# Altium PCB Battery_Flex.PcbDoc
Units mm, origin at the board's own origin, x right, y up, seen from the top; angles counter-clockwise.
Board outline 55.75 x 81.77 mm, 2 copper layers (Top Layer, Bottom Layer), stack 0.095 mm thick; 2 components, 3 nets, 20 pads, 30 vias.
Unrouted connection lines stored in the file: 17.
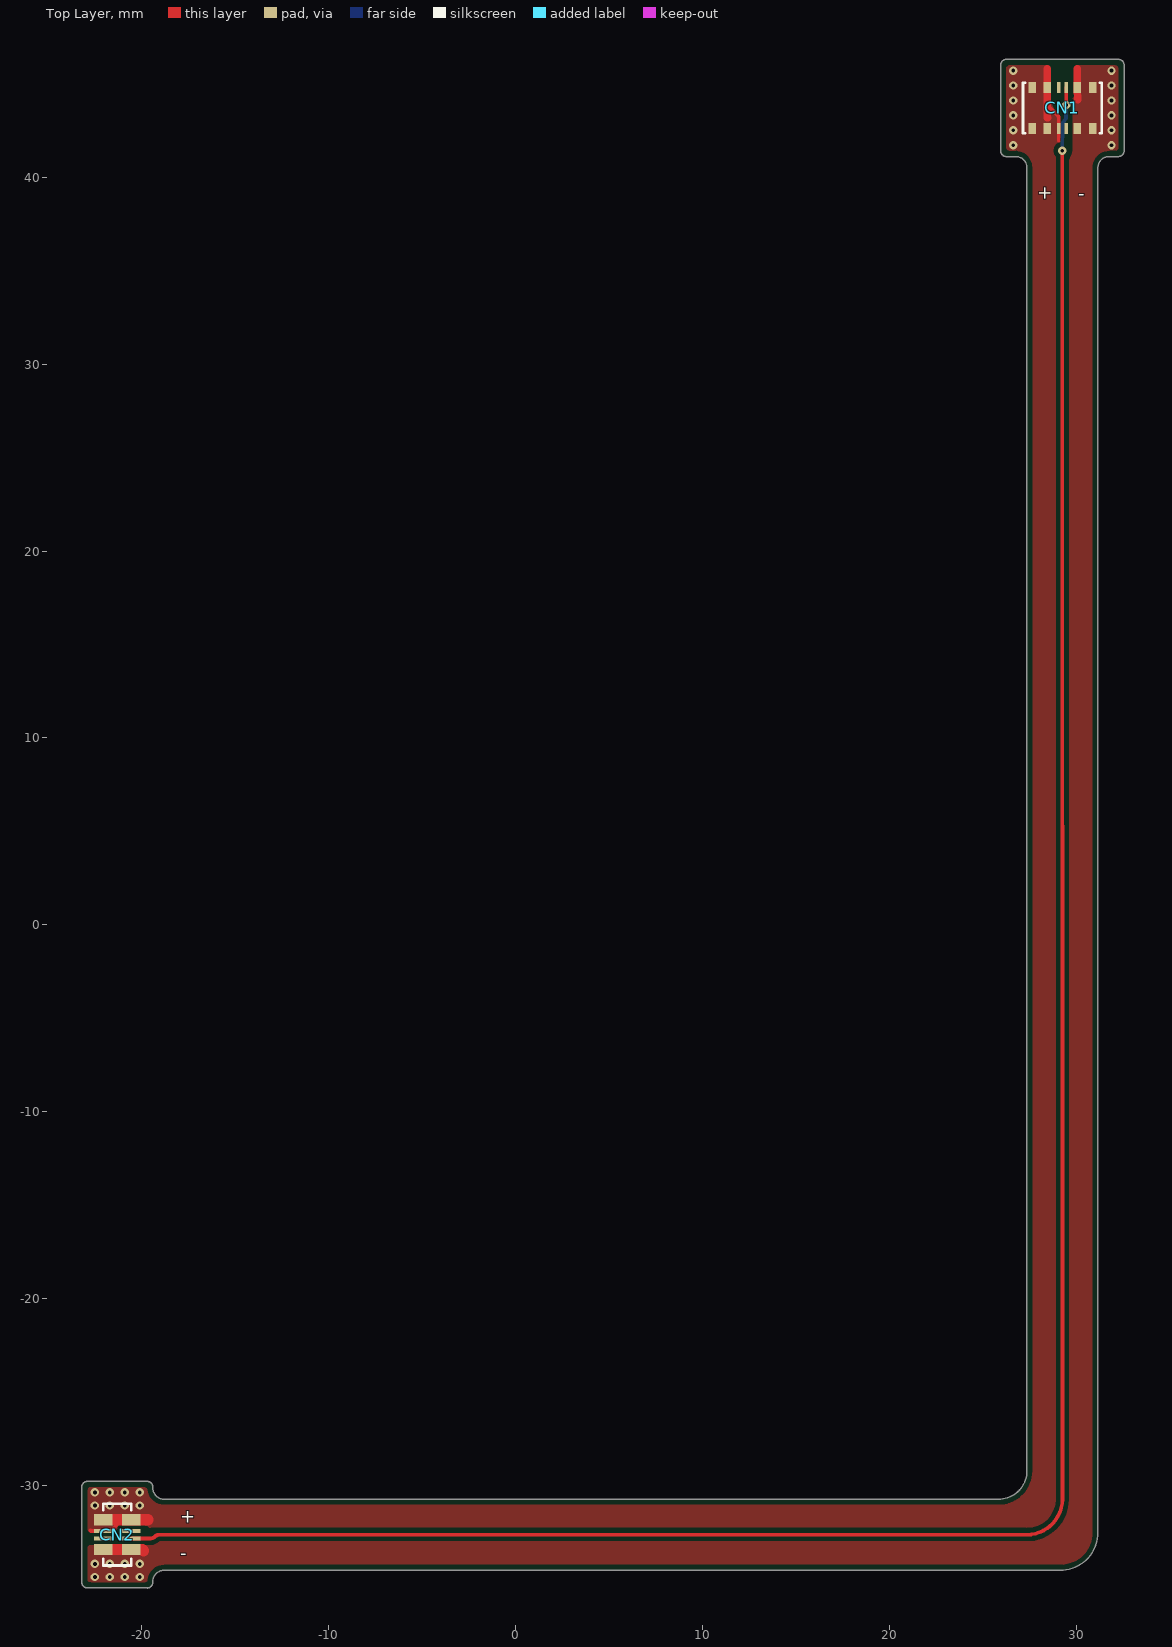
[diagram p0: Top Layer view]
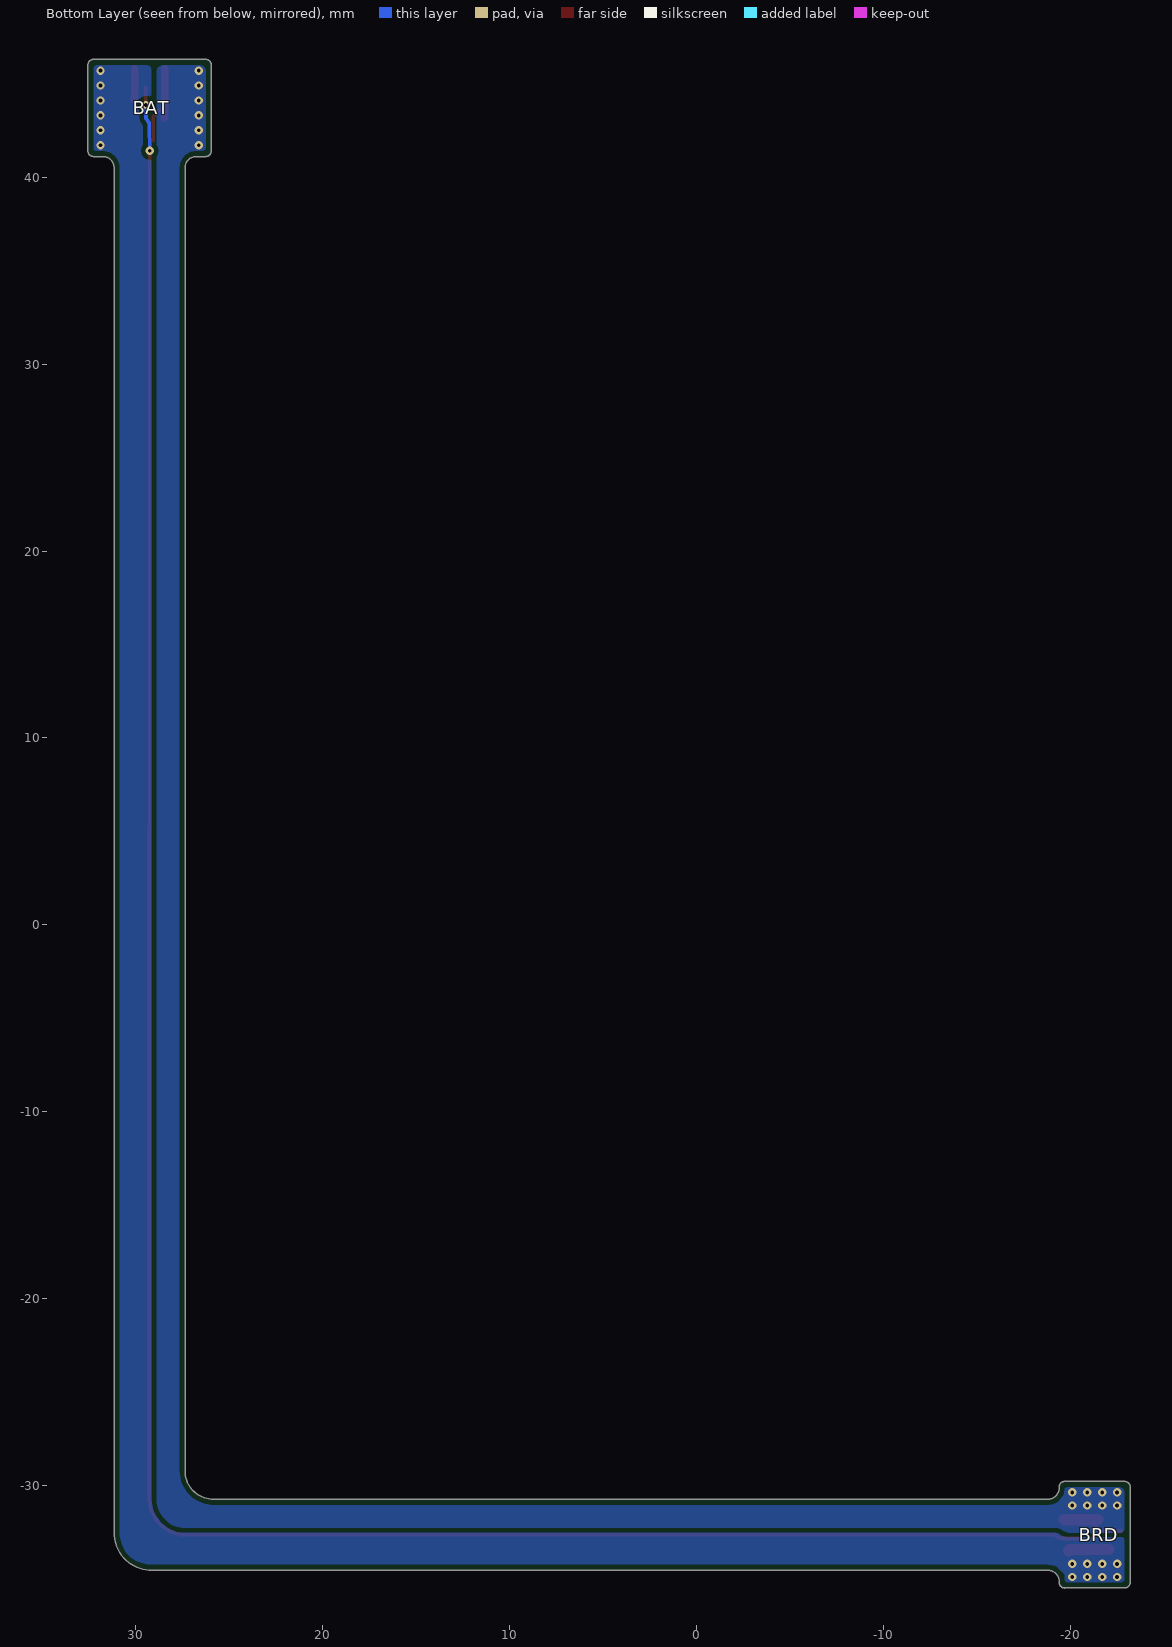
[diagram p1: Bottom Layer view, seen from below]

## Layer stack, top to bottom
Top Solder: solder mask 0.05, Solder Resist, Dk 2.9
Top Layer: signal copper 0.035
Dielectric1: prepreg 0.025, FR-4, Dk 3.3
Bottom Layer: signal copper 0.035
Bottom Solder: solder mask 0.05, Solder Resist, Dk 2.9

## Board outline
-22.897,-35.461 -19.706,-35.461 -19.709,-35.466 ccw(c-19.703,-35.166) -19.403,-35.164 -19.403,-35.121 cw(c-18.803,-35.116) -18.792,-34.516 -18.792,-34.511 29.111,-34.511 ccw(c29.15,-32.511) 31.15,-32.493 31.15,40.494 cw(c31.75,40.5) 31.762,41.099 32.244,41.099 ccw(c32.25,41.399) 32.55,41.402 32.55,45.993 ccw(c32.25,45.999) 32.247,46.299 26.256,46.299 ccw(c26.25,45.999) 25.95,45.996 25.95,41.405 ccw(c26.25,41.399) 26.253,41.099 26.745,41.099 cw(c26.751,40.499) 27.35,40.487 27.35,-29.196 27.349,-29.198 cw(c25.849,-29.211) 25.82,-30.711 -18.776,-30.711 -18.795,-30.711 cw(c-18.801,-30.111) -19.4,-30.1 -19.4,-30.067 ccw(c-19.7,-30.062) -19.703,-29.762 -22.894,-29.761 ccw(c-22.9,-30.061) -23.2,-30.064 -23.2,-35.155 ccw(c-22.9,-35.161)

## Design rules (kind name [scope] priority, off if disabled: settings)
BoardOutlineClearance Stiffener [OnLayer('Stiffener')] p1: gap=0 ignorepadtopadclearanceinfootprint=FALSE except(0.3: Track-OutlineEdge Track-CutoutEdge THPad-OutlineEdge THPad-CutoutEdge Via-OutlineEdge Via-CutoutEdge Fill-CutoutEdge Poly-CutoutEdge Region-CutoutEdge)
BoardOutlineClearance BoardOutlineClearanceAll [All] p2: gap=0 ignorepadtopadclearanceinfootprint=FALSE except(0.3: Track-OutlineEdge Track-CutoutEdge SMDPad-OutlineEdge THPad-OutlineEdge THPad-CutoutEdge Via-OutlineEdge Via-CutoutEdge Fill-OutlineEdge Fill-CutoutEdge Poly-OutlineEdge Poly-CutoutEdge Region-CutoutEdge)
Clearance [All] p1: gap=0.254 ignorepadtopadclearanceinfootprint=FALSE except(0: Via-Text Fill-Text Poly-Text Region-Text; 0.089: Arc-Arc Arc-Track Track-Track; 0.1: Arc-Via Track-Via; 0.127: SMDPad-SMDPad; 0.15: Arc-SMDPad Track-SMDPad Text-Text; 0.2: Arc-THPad Arc-Text Arc-Hole Track-THPad Track-Text Track-Hole SMDPad-THPad SMDPad-Via SMDPad-Text SMDPad-Hole THPad-THPad THPad-Via THPad-Text THPad-Hole Via-Via Via-Hole Fill-Hole Poly-Hole Region-Hole Text-Hole)
DiffPairsRouting [InDifferentialPairClass('All Differential Pairs')] p1: maxlimit=0.127 minlimit=0.127 mostfreqgap=0.127 toplayer_minwidth=0.052 toplayer_maxwidth=0.052 toplayer_prefwidth=0.052 bottomlayer_minwidth=0.052 bottomlayer_maxwidth=0.052 bottomlayer_prefwidth=0.052 maxuncoupledlength=12.7
HoleSize [All] p1: absolutevalues=TRUE maxlimit=6.5 minlimit=0.15 maxpercent=80.000 minpercent=20.000
HoleToHoleClearance [IsPad vs IsPad] p1: gap=0.45 allowstackedmicrovias=TRUE
MatchedLengths MatchedLengths_1 [All] p1: tolerance=0.127 checknetsindiffpair=TRUE checkdiffpairvsdiffpair=FALSE checkxsignals=FALSE checkothers=FALSE
MinimumAnnularRing [All] p1: minimumring=0.1
MinimumSolderMaskSliver [All] p1: minsoldermaskwidth=0
PlaneClearance [All] p1: clearance=0.3
PlaneConnect [All] p1: pad.planeconnectstyle=Relief pad.reliefexpansion=0.508 pad.reliefentries=4 pad.reliefconductorwidth=0.254 pad.reliefairgap=0.254 via.planeconnectstyle=Direct via.reliefexpansion=0.508 via.reliefentries=4 via.reliefconductorwidth=0.254 via.reliefairgap=0.254
PolygonConnect ALL [All] p1: connectstyle=Direct reliefconductorwidth=0.254 reliefentries=4 polygonreliefangle="90 Angle" airgapwidth=0.254
PolygonConnect 3V3 [InNet('+3V3')] p2: connectstyle=Direct reliefconductorwidth=0.254 reliefentries=4 polygonreliefangle="90 Angle" airgapwidth=0.254
PolygonConnect GND [InNet('GND')] p3: thpad.connectstyle=Relief thpad.reliefconductorwidth=0.254 thpad.reliefentries=4 thpad.polygonreliefangle="90 Angle" thpad.airgapwidth=0.254 smdpad.connectstyle=Relief smdpad.reliefconductorwidth=0.254 smdpad.reliefentries=4 smdpad.polygonreliefangle="90 Angle" smdpad.airgapwidth=0.254 via.connectstyle=Direct via.reliefconductorwidth=0.254 via.reliefentries=4 via.polygonreliefangle="90 Angle" via.airgapwidth=0.254
PolygonConnect 5V [InNet('+5V')] p4: connectstyle=Direct reliefconductorwidth=0.254 reliefentries=4 polygonreliefangle="90 Angle" airgapwidth=0.254
RoutingVias [All] p1: holewidth=0.15 width=0.35 viastyle="Through Hole" minholewidth=0.15 minwidth=0.35 maxholewidth=0.254 maxwidth=0.508
SMDNeckDown [All] p1: percent=200.000
SilkToSilkClearance [All] p1: silktosilkclearance=0.15
SilkToSolderMaskClearance SilkscreenOverComponentPads [IsPad] p1: minsilkscreentomaskgap=0.08 clearancetoexposedcopper=TRUE
SolderMaskExpansion [All] p1: expansion=0.1 istentingtop=FALSE
Width [All] p1: maxlimit=5 minlimit=0.089 preferedwidth=0.15 minimp=50.000000 maximp=50.000000 favimp=50.000000
22 further rules are at their usual default settings.

## Components (designator, comment, footprint, x,y, rotation, side; value= is the part's Value field where it differs from the comment)
CN1 "BAT" BAT_SS_EB-BA217ABY 29.25,43.699 r180 top
CN2 "BRD" BAT_SS_EB-BA217ABY_FLEX_CN -21.3,-32.611 r270 top

## Footprints (in the part's own frame and the unit in brackets; to place one, negate y for a bottom-side part, rotate by r counter-clockwise, add the part's x,y. Pads: shape width x height; smd on the part's side, far side on the other; paste and mask are expansions set on the pad)
BAT_SS_EB-BA217ABY [mm]
  rect 0.2x0.6 smd: 1(0.2,1.1) 3(-0.2,-1.1) 4(-0.2,1.1) 4(0.2,-1.1)
  rect 0.4x0.6 smd: 1(0.8,1.1) 1(0.8,-1.1) 1(1.625,1.1) 1(1.625,-1.1) 2(-1.625,1.1) 2(-1.625,-1.1) 2(-0.8,1.1) 2(-0.8,-1.1)
  silkscreen extent -2.1,-1.35 2.1,1.35
BAT_SS_EB-BA217ABY_FLEX_CN [mm] "Samsung 5Ah Battery Flex Connector"
  rect 0.6x1 smd: 1(-0.8,0.75) 1(-0.8,-0.75) 2(0.8,0.75) 2(0.8,-0.75)
  rect 0.2x1 smd: 1(-0.2,-0.75) 3(0.2,0.75) 4(-0.2,0.75) 4(0.2,-0.75)
  silkscreen extent -1.65,-0.75 1.65,0.75

## Part data
CN1: library part BAT_SS_EB-BA217ABY, "Samsung battery connector"
CN2: library part BAT_SS_EB-BA217ABY_FLEX_CN, "Samsung battery connector", System=Connector

## Via types
v1: diameter 0.45, hole 0.2, Top Layer to Bottom Layer, tented both sides, 30 vias

## Nets (pads, with @x,y where several pads share a name; then routed paths per layer and width w, separated by ;. In a path a pad name is that pad's centre, name@x,y a point inside that pad or via, vN(x,y) a via of type N, cw(c..) or ccw(c..) an arc to the next point about the centre after c; other vN are vias at no path point)
GND: CN1.2 CN2.2 | length 3.8
  Top Layer w0.4: 30.043,45.799 30.05,45.792 30.05,44.699 30.074,44.15
  Top Layer w0.6: CN2.2@-22.05,-33.411 -20.55,-33.411 -19.964,-33.411 -19.9,-33.475
  other v1: -22.5,-34.875 -21.7,-34.875 -20.9,-34.875 -20.1,-34.875 -22.5,-34.175 -21.7,-34.175 -20.9,-34.175 -20.1,-34.175 31.875,41.7 31.875,42.5 31.875,43.3 31.875,44.1 31.875,44.9 31.875,45.7
NTC: CN1.3 CN2.3 | length 126.5
  Top Layer w0.2: CN2.3 -19.509,-32.811 ccw(c-19.509,-32.516) -19.3,-32.725 cw(c-19.025,-33) -19.025,-32.611 27.35,-32.611 ccw(c27.35,-30.711) 29.25,-30.712 v1(29.245,41.405) ; v1(29.449,43.859) 29.45,44.599 CN1.3
  Bottom Layer w0.2: v1(29.245,41.405) 29.264,42.755 cw(c29.713,42.754) 29.39,43.065 ccw(c29.245,43.204) 29.445,43.204 v1(29.449,43.859)
VBAT: CN1.1 CN2.1 | length 8.3
  Top Layer w0.2: -22.732,-32.393 -22.714,-32.411 -21.636,-32.411 -21.255,-32.03 ; 28.45,43.932 ccw(c28.65,43.933) 28.508,43.792 28.992,43.308 ; 28.992,43.308 cw(c28.85,43.167) 29.05,43.167 29.05,42.599 29.05,41.95
  Top Layer w0.4: 28.45,45.797 28.45,44.799 28.45,43.932 28.45,43.174 28.456,43.167
  Top Layer w0.6: -21.474,-31.811 -20.55,-31.811 -19.654,-31.811
  other v1: -22.5,-31.05 -21.7,-31.05 -20.9,-31.05 -20.1,-31.05 -22.5,-30.35 -21.7,-30.35 -20.9,-30.35 -20.1,-30.35 26.625,41.7 26.625,42.5 26.625,43.3 26.625,44.1 26.625,44.9 26.625,45.7
pads on no net: CN1.4 CN2.4

## Polygon pours and split planes (outlines as drawn)
no net on Bottom Courtyard "NONET_L01_P-001" (solid, pour order 40): 26.739,46.299 26.282,46.299 ccw(c26.282,45.969) 25.952,45.969 25.952,41.392 ccw(c26.247,41.392) 26.247,41.097 26.724,41.097 cw(c26.724,40.469) 27.352,40.469 27.352,40.403 ccw(c27.648,40.403) 27.648,40.107 30.863,40.107 ccw(c30.863,40.396) 31.152,40.396 31.152,40.495 cw(c31.751,40.495) 31.751,41.094 32.23,41.094 ccw(c32.23,41.419) 32.555,41.419 32.555,46.001 ccw(c32.257,46.001) 32.257,46.299 26.804,46.298
no net on Bottom Courtyard "NONET_L01_P-001" (solid): -22.227,-29.752 -22.886,-29.752 ccw(c-22.886,-30.066) -23.2,-30.066 -23.2,-35.157 ccw(c-22.903,-35.157) -22.903,-35.454 -19.697,-35.454 ccw(c-19.697,-35.157) -19.4,-35.157 -19.4,-35.014 cw(c-18.919,-35.017) -18.926,-34.536 -18.821,-34.536 ccw(c-18.821,-34.191) -18.476,-34.191 -18.476,-30.996 ccw(c-18.761,-30.996) -18.761,-30.711 -18.792,-30.711 cw(c-18.792,-30.108) -19.395,-30.108 -19.395,-30.042 ccw(c-19.686,-30.042) -19.686,-29.751
GND on Bottom Layer "NONET_L01_P-001" (solid, pour order 44): 29.15,-30.708 cw(c27.359,-30.708) 28.625,-31.975 cw(c27.358,-30.708) 27.358,-32.5 -19.148,-32.493 ccw(c-19.148,-32.914) -19.352,-32.546 -19.504,-32.63 cw(c-19.775,-32.141) -19.775,-32.7 -22.655,-32.7 ccw(c-22.65,-32.95) -22.9,-32.95 -22.9,-34.95 ccw(c-22.7,-34.95) -22.7,-35.15 -19.85,-35.15 ccw(c-19.85,-35) -19.7,-35 -19.7,-34.875 cw(c-19.398,-34.875) -19.612,-34.662 -19.3,-34.35 cw(c-19.059,-34.591) -19.059,-34.25 29.153,-34.25 ccw(c29.153,-32.628) 30.3,-33.775 ccw(c28.973,-32.447) 30.85,-32.447 30.85,40.486 cw(c31.789,40.486) 31.125,41.15 cw(c31.728,40.547) 31.729,41.4 32.079,41.4 ccw(c32.079,41.571) 32.2,41.45 ccw(c32.08,41.57) 32.25,41.571 32.25,45.804 ccw(c32.081,45.805) 32.2,45.925 ccw(c32.02,45.746) 32.019,46 29.45,46 ccw(c29.45,45.7) 29.15,45.7 29.15,44.5
VBAT on Bottom Layer "NONET_L01_P-001" (solid, pour order 43): 28.875,45.625 ccw(c28.5,45.625) 28.5,46 26.6,46 ccw(c26.6,45.65) 26.25,45.65 26.25,41.6 ccw(c26.45,41.6) 26.45,41.4 26.7,41.4 cw(c26.7,40.45) 27.65,40.45 27.65,-29.2 cw(c25.825,-29.2) 25.825,-31.025 -18.8,-31.025 cw(c-18.8,-30.125) -19.7,-30.125 ccw(c-19.75,-30.125) -19.75,-30.075 -22.6,-30.075 ccw(c-22.6,-30.375) -22.9,-30.375 -22.9,-32.275 ccw(c-22.675,-32.275) -22.675,-32.5 -19.925,-32.5 ccw(c-19.925,-31.954) -19.608,-32.398 -19.542,-32.352 cw(c-19.225,-32.796) -19.225,-32.25 27.42,-32.25 ccw(c27.42,-30.97) 28.325,-31.875 28.451,-31.749 ccw(c27.427,-30.725) 28.875,-30.725 28.875,38.825
GND on Top Layer "NONET_L01_P-001" (solid, pour order 42): 29.9,45.8 cw(c30.1,45.8) 30.1,46 32.2,46 cw(c32.2,45.9) 32.3,45.9 32.3,41.5 cw(c32.2,41.5) 32.2,41.4 31.7,41.4 ccw(c31.7,40.6) 30.9,40.6 30.9,-32.5 cw(c29.1,-32.5) 29.1,-34.3 -18.8,-34.3 ccw(c-18.8,-35.1) -19.6,-35.1 cw(c-19.8,-35.1) -19.8,-35.3 -22.7,-35.3 cw(c-22.7,-35.1) -22.9,-35.1 -22.9,-33.2 cw(c-22.8,-33.2) -22.8,-33.1 -19.471,-33.1 ccw(c-19.471,-32.688) -19.179,-32.979 -19.103,-32.903 cw(c-18.854,-33.152) -18.854,-32.8 27.351,-32.8 ccw(c27.351,-30.751) 28.8,-32.2 ccw(c27.352,-30.752) 29.4,-30.751 29.4,40.559 cw(c29.741,40.559) 29.5,40.8 ccw(c28.776,41.524) 29.8,41.524 29.8,44.176 cw(c29.882,44.176) 29.824,44.234 ccw(c29.641,44.417) 29.9,44.417 29.9,44.634
VBAT on Top Layer "NONET_L01_P-001" (solid, pour order 41): -21.641,-32.5 ccw(c-21.641,-32.159) -21.4,-32.4 -21.3,-32.3 -21.2,-32.2 cw(c-20.959,-32.441) -20.959,-32.1 -19.941,-32.1 cw(c-19.941,-32.441) -19.7,-32.2 -19.654,-32.246 ccw(c-18.8,-31.393) -18.8,-32.6 -13.241,-32.6 ccw(c-13.241,-32.259) -13,-32.5 cw(c-12.759,-32.741) -12.759,-32.4 27.393,-32.4 ccw(c27.393,-30.693) 28.6,-31.9 ccw(c27.393,-30.693) 29.1,-30.693 29.1,43.159 ccw(c28.759,43.159) 29,43.4 cw(c29.966,44.366) 28.6,44.366 28.6,45.8 ccw(c28.4,45.8) 28.4,46 26.3,46 ccw(c26.3,45.9) 26.2,45.9 26.2,41.5 ccw(c26.3,41.5) 26.3,41.4 26.8,41.4 cw(c26.8,40.6) 27.6,40.6 27.6,-29.2 cw(c25.9,-29.2) 25.9,-30.9 -19,-30.9 cw(c-19,-30.3) -19.6,-30.3 -19.6,-30.2 ccw(c-19.8,-30.2) -19.8,-30 -22.6,-30 ccw(c-22.6,-30.3) -22.9,-30.3 -22.9,-32.3 ccw(c-22.7,-32.3) -22.7,-32.5 -22.2,-32.5

## Other copper
Top Layer:
  pour cut-out: -20,-32.125 -19.806,-32.125 cw(c-19.806,-32.381) -19.625,-32.2 ccw(c-19.504,-32.079) -19.504,-32.25 -19,-32.25 cw(c-19.121,-32.25) -19.035,-32.335 -19.05,-32.35 ccw(c-19.05,-32.712) -19.306,-32.456 -19.35,-32.5 cw(c-19.41,-32.44) -19.41,-32.525 -19.75,-32.525 cw(c-19.75,-32.404) -19.835,-32.49 -19.925,-32.4 cw(c-19.744,-32.219) -20,-32.219 -20,-32.15
  pour cut-out: -22.7,-35.15 -22.75,-35.15 cw(c-22.75,-35) -22.9,-35 -22.9,-34.95 ccw(c-23.05,-34.95) -23.05,-34.8 -23.15,-34.8 ccw(c-23.15,-35.025) -23.375,-35.025 -23.375,-35.25 ccw(c-22.975,-35.25) -22.975,-35.65 -22.475,-35.65 ccw(c-22.475,-35.5) -22.325,-35.5 -22.325,-35.45 ccw(c-22.425,-35.45) -22.425,-35.35 -22.5,-35.35 cw(c-22.5,-35.225) -22.625,-35.225 ccw(c-22.7,-35.225)
  pour cut-out: -20.05,-30.075 -19.85,-30.075 cw(c-19.85,-30.225) -19.7,-30.225 ccw(c-19.6,-30.225) -19.6,-30.325 -19.275,-30.325 ccw(c-19.275,-30.275) -19.225,-30.275 -19.225,-29.9 ccw(c-19.25,-29.9) -19.25,-29.875 -20.025,-29.875 ccw(c-20.025,-29.95) -20.1,-29.95 -20.1,-30 -20.1,-30.025 ccw(c-20.05,-30.025)
  pour cut-out: 31.85,46 32.025,46 cw(c32.025,45.775) 32.25,45.775 32.25,45.6 ccw(c32.5,45.6) 32.5,45.35 32.725,45.35 ccw(c32.725,45.675) 33.05,45.675 33.05,46.25 ccw(c32.85,46.25) 32.85,46.45 32.05,46.45 ccw(c32.05,46.25) 31.85,46.25
  pour cut-out: 26.25,41.875 26.25,41.6 ccw(c26.45,41.6) 26.45,41.4 26.65,41.4 cw(c26.65,41.225) 26.825,41.225 26.825,40.8 cw(c26.525,40.8) 26.525,40.5 26.05,40.5 cw(c26.05,40.95) 25.6,40.95 25.6,41.675 cw(c25.8,41.675) 25.8,41.875

## Silkscreen, mask and mechanical layers (free items; w line width, h text height)
Top Overlay:
  text "-" at 30.45,39.3 h0.7 r180
  text "+" at 28.617,38.725 h0.7 r90
  text "+" at -17.925,-31.967 h0.7
  text "-" at -17.925,-33.925 h0.7
Board Outline:
  lines w0.15: -19.709,-35.466 ccw(c-19.703,-35.166) -19.403,-35.164 ; -19.706,-35.461 -22.897,-35.461 cw(c-22.9,-35.161) -23.2,-35.155 -23.2,-30.064 cw(c-22.9,-30.061) -22.894,-29.761 -19.703,-29.761 cw(c-19.7,-30.062) -19.4,-30.067 ; -19.403,-35.121 cw(c-18.803,-35.116) -18.792,-34.516 ; -19.4,-30.1 ccw(c-18.801,-30.111) -18.795,-30.711 ; -18.792,-34.511 29.111,-34.511 ccw(c29.15,-32.511) 31.15,-32.493 31.15,40.494 cw(c31.75,40.5) 31.762,41.099 32.244,41.099 ccw(c32.25,41.399) 32.55,41.402 32.55,45.993 ccw(c32.25,45.999) 32.247,46.299 ; -18.776,-30.711 25.82,-30.711 ccw(c25.849,-29.211) 27.349,-29.198 ; 25.95,45.996 25.95,41.405 ccw(c26.25,41.399) 26.253,41.099 26.745,41.099 cw(c26.751,40.499) 27.35,40.487 27.35,-29.196 ; 25.95,45.996 cw(c26.25,45.999) 26.256,46.299 32.247,46.299
Stiffener (Mech20):
  lines w0.15: -20.65,-28.95 -16.625,-24.8 ; 7.875,-20.8 26.125,40.1
  text "Stiffener: Stainless Steel" at -16.2,-20.275 h0.7
  text "Stiffener Thickness: 0.2mm" at -16.2,-21.475 h0.7
  text "Stiffener Location: Shown on this layer(GM20)" at -16.2,-22.642 h0.7
  text "Place under bottom layer side opposite the exposed pads" at -16.2,-23.842 h0.7

## Dimensions
-20.55,-31.811 to -20.55,-24.25 on Dimensions
-18.776,-30.711 to -18.795,-30.711 on Dimensions
-22.05,-31.811 to -30.05,-31.21 on Dimensions
31.15,-32.493 to 31.15,40.494 on Dimensions
30.875,44.799 to 40.749,44.799 on Dimensions
27.65,30.4 to 28.875,30.3 on Dimensions
-21.3,-32.611 to -33.057,-32.811 on Dimensions
-21.3,-32.611 to -27.329,-32.411 on Dimensions
29.25,43.699 to 29.45,41.966 on Dimensions
29.25,43.699 to 29.05,40.158 on Dimensions
32.55,45.993 to 32.25,40.473 on Dimensions
29.111,-34.511 to 29.1,-34.211 on Dimensions
-18.795,-30.711 to -22.795,-31.011 on Dimensions
-19.703,-29.761 to -24.3,-30.061 on Dimensions
-22.897,-35.461 to -26.575,-35.161 on Dimensions
-23.2,-35.155 to -22.9,-35.461 on Dimensions
27.35,-29.196 to 27.65,-29.1 on Dimensions
31.15,40.494 to 30.85,35.494 on Dimensions
25.95,45.996 to 26.25,41.966 on Dimensions
32.244,41.099 to 25.025,36.399 on Dimensions
26.256,46.299 to 25.95,45.999 on Dimensions
22.731,-32.611 to -36.809,-39.811 on Dimensions
29.25,41.772 to -25.3,-30.572 on Dimensions
29.686,38.699 to 24.405,-32.611 on Dimensions